# EAGLE board PIC32 (EAGLE 5.12)
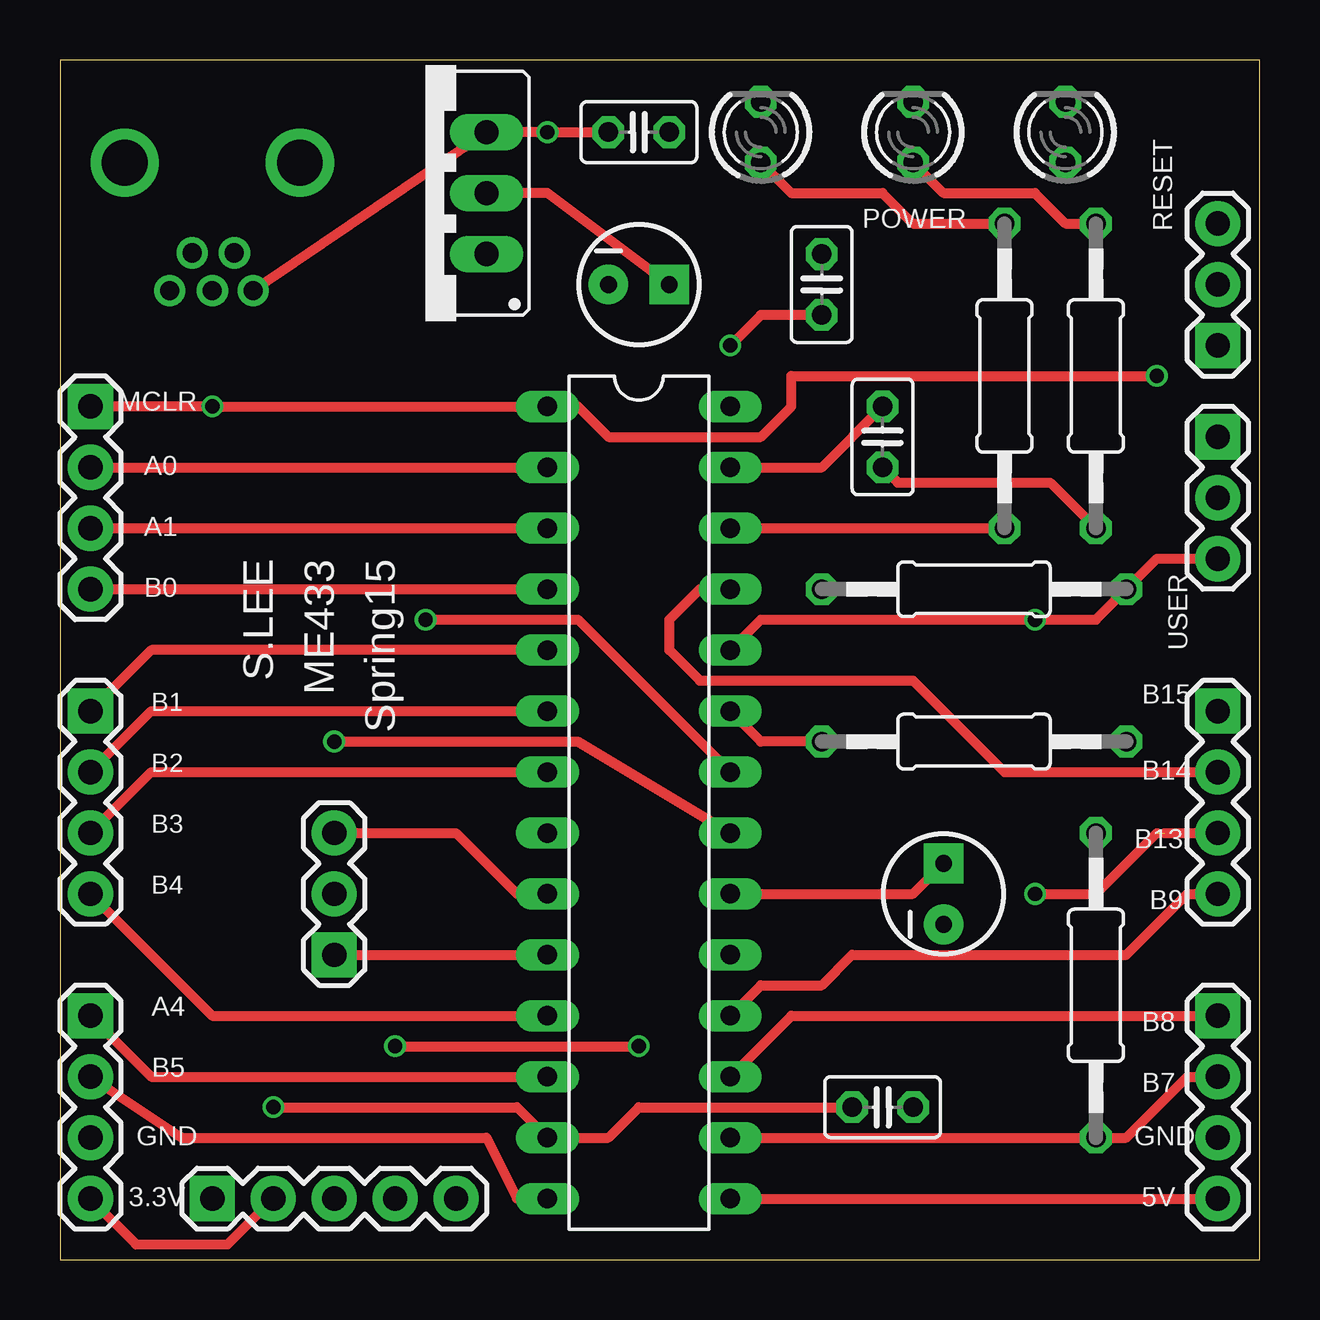
[diagram p0: board, top side]
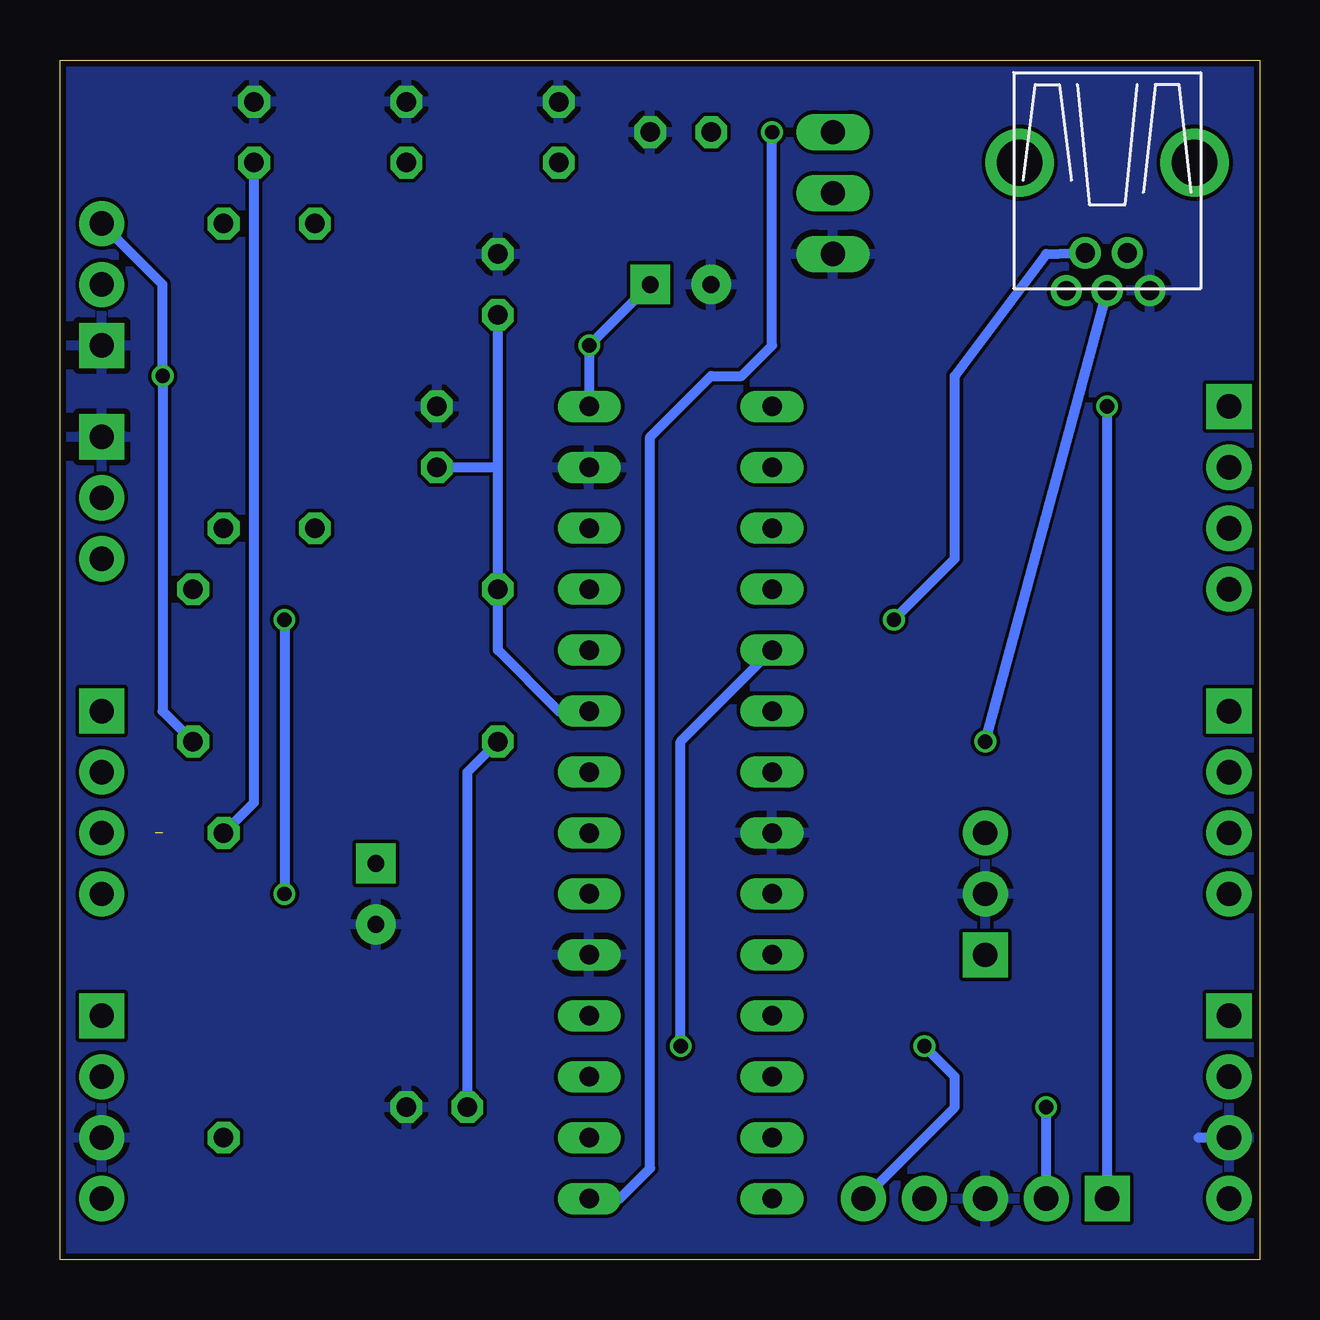
[diagram p1: board, bottom side, seen from below]

Size 50 x 50 mm. Coordinates in mm from the lower left corner, seen from the top.
Outline: 0,0 50,0 50,50 0,50 0,0
Copper layers (1*16): Top 0.035mm / dielectric 1.5mm / Bottom 0.035mm
Design rules "SeeedStudio_2layer_DRU_no_angle_20140221": minimum track width 6mil, minimum drill 12mil, track to track 6mil, track to pad 6mil, pad to pad 6mil, via to via 6mil, smd to smd 0mil, copper to edge 10mil, drill to drill 10mil, minimum pad ring 10mil, minimum via ring 6mil, stop-mask expansion 2mil, vias tented up to drill 100mil, thermal gap 10mil

## Footprints (pad centres in the part's own frame; a part is rotated, then mirrored left to right if it is on the bottom)
C025-025X050 = drill 0.813 octagon: 1 -1.27,0; 2 1.27,0
LED3MM = drill 0.813 octagon: A -1.27,0; K 1.27,0
0207/12 = drill 0.813 octagon: 1 -6.35,0; 2 6.35,0
DIL28-3 = drill 0.813 long: 1 -16.51,-3.81; 2 -13.97,-3.81; 3 -11.43,-3.81; 4 -8.89,-3.81; 5 -6.35,-3.81; 6 -3.81,-3.81; 7 -1.27,-3.81; 8 1.27,-3.81; 9 3.81,-3.81; 10 6.35,-3.81; 11 8.89,-3.81; 12 11.43,-3.81; 13 13.97,-3.81; 14 16.51,-3.81; 15 16.51,3.81; 16 13.97,3.81; 17 11.43,3.81; 18 8.89,3.81; 19 6.35,3.81; 20 3.81,3.81; 21 1.27,3.81; 22 -1.27,3.81; 23 -3.81,3.81; 24 -6.35,3.81; 25 -8.89,3.81; 26 -11.43,3.81; 27 -13.97,3.81; 28 -16.51,3.81
1X03 = drill 1.016 pad 1.88 square: 1 0,0 | drill 1.016 pad 1.88 round: 2 2.54,0; 3 5.08,0
CAP_POL_D = drill 0.7 pad 1.651 square: 1 1.27,0 | drill 0.7 pad 1.651 round: 2 -1.27,0
USB-MINIB = drill 0.8 round: D+ 4.064,0; D- 2.489,0.914; GND 4.064,-1.778; ID 2.489,-0.838; VBUS 4.064,1.702 | drill 1.9 round: P$6 -1.27,-3.65; P$7 -1.27,3.65
TO220 = drill 1.016 long: 1 -2.54,0; 2 0,0; 3 2.54,0
1X04 = drill 1.016 pad 1.88 square: 1 0,0 | drill 1.016 pad 1.88 round: 2 2.54,0; 3 5.08,0; 4 7.62,0
1X05 = drill 1.016 pad 1.88 square: 1 0,0 | drill 1.016 pad 1.88 round: 2 2.54,0; 3 5.08,0; 4 7.62,0; 5 10.16,0

## Placement (x,y rotation side)
C2  0.1uF  [C025-025X050]  31.75,40.64 270 top
C4  0.1uF  [C025-025X050]  34.29,34.29 270 top
C5  0.1uF  [C025-025X050]  24.13,46.99 180 top
C6  0.1uF  [C025-025X050]  34.29,6.35 0 top
LED1  [LED3MM]  29.21,46.99 90 top
LED2  [LED3MM]  35.56,46.99 90 top
LED3  [LED3MM]  41.91,46.99 90 top
R1  10k  [0207/12]  38.1,21.59 180 top
R2  330  [0207/12]  43.18,36.83 270 top
R3  330  [0207/12]  39.37,36.83 270 top
R4  330  [0207/12]  43.18,11.43 270 top
R5  10k  [0207/12]  38.1,27.94 180 top
U$1  PIC32  [DIL28-3]  24.13,19.05 270 top
U$4  1X03_HEADER  [1X03]  48.26,38.1 90 top
U$5  10uF  [CAP_POL_D]  36.83,15.24 90 top
U$6  1X03_HEADER  [1X03]  48.26,34.29 270 top
U$7  USB  [USB-MINIB]  6.35,44.45 270 top
U$9  LD1117  [TO220]  17.78,44.45 90 top
U$11  10uF  [CAP_POL_D]  24.13,40.64 0 top
U$12  1X04_HEADER  [1X04]  1.27,35.56 270 top
U$13  1X04_HEADER  [1X04]  1.27,22.86 270 top
U$14  1X04_HEADER  [1X04]  48.26,22.86 270 top
U$15  1X04_HEADER  [1X04]  1.27,10.16 270 top
U$16  1X04_HEADER  [1X04]  48.26,10.16 270 top
U$17  PICkit3  [1X05]  6.35,2.54 0 top
U$18  1X03_HEADER  [1X03]  11.43,12.7 90 top

## Library data of the parts
C2 C4-C6 = resistor
LED1-LED3 R1-R5 U$1 U$4-U$7 U$9 U$11-U$18 = ME433

## Nets
A0: U$1.2 U$12.2
A1: U$1.3 U$12.3
A4: U$1.12 U$15.1
B0: U$1.4 U$12.4
B2: U$1.6 U$13.2
B4: U$1.11 U$13.4
B5: U$1.14 U$15.2
B7: R4.2 U$1.16 U$16.2
B14: U$1.25 U$14.2
B15: R3.2 U$1.26
D+: U$1.21 U$7.D+
D-: U$1.22 U$7.D-
GND: C2.1 C4.1 C5.1 C6.2 LED1.K LED2.K LED3.K U$1.8 U$1.19 U$1.27 U$4.1 U$5.2 U$6.1 U$7.GND U$9.1 U$11.2 U$15.3 U$16.3 U$17.3 U$18.2
MCLR: R1.1 U$1.1 U$4.3 U$12.1 U$17.1
N$1: LED3.A R4.1
N$2: LED2.A R2.1
N$4: U$1.10 U$18.1
N$5: U$1.9 U$18.3
N$6: C2.2 C4.2 C6.1 R1.2 R2.2 R5.2 U$1.13 U$1.23 U$1.28 U$9.2 U$11.1 U$15.4 U$17.2
N$7: C5.2 U$1.15 U$7.VBUS U$9.3 U$16.4
N$8: R5.1 U$1.24 U$6.3 U$14.3
N$9: U$1.5 U$13.1 U$17.5
N$18: U$1.20 U$5.1
N$31: LED1.A R3.1
R0: U$17.4
R3: U$1.7 U$13.3
R8: U$1.17 U$16.1
R9: U$1.18 U$14.4
R15: U$14.1

## Tracks (layer width: path | path; a pad name or v marks a point on that pad's centre or on a via)
A0
  Top 0.406: U$12.2 U$1.2
A1
  Top 0.406: U$12.3 U$1.3
A4
  Top 0.406: U$1.12 3.81,7.62 U$15.1
B0
  Top 0.406: U$12.4 U$1.4
B2
  Top 0.406: U$13.2 3.81,22.86 U$1.6
B4
  Top 0.406: U$13.4 6.35,10.16 U$1.11
B5
  Top 0.406: U$1.14 19.05,2.54 17.78,5.08 5.08,5.08 U$15.2
B7
  Top 0.406: U$1.16 R4.2 44.45,5.08 46.99,7.62 U$16.2
B14
  Top 0.406: U$1.25 26.67,27.94 25.4,26.67 25.4,25.4 26.67,24.13 35.56,24.13 39.37,20.32 U$14.2
B15
  Top 0.406: U$1.26 R3.2
D+  (via drill 0.6)
  Top 0.406: U$1.21 21.59,21.59 v11.43,21.59
  Bottom 0.406: v11.43,21.59 U$7.D+
D-  (via drill 0.6)
  Top 0.406: U$1.22 21.59,26.67 v15.24,26.67
  Bottom 0.406: v15.24,26.67 12.7,29.21 12.7,36.83 8.89,41.91 U$7.D-
GND
  Top 0.406: U$1.27 31.75,33.02 C4.1
  Bottom 0.406: U$15.3 2.54,5.08
  pour Bottom: -6.35,53.34 -6.35,-2.54 53.34,-2.54 53.34,55.88 -6.35,55.88
MCLR  (via drill 0.6)
  Top 0.406: U$12.1 v6.35,35.56 U$1.1 21.59,35.56 22.86,34.29 29.21,34.29 30.48,35.56 30.48,36.83 v45.72,36.83
  Bottom 0.406: U$17.1 v6.35,35.56 | R1.1 45.72,22.86 v45.72,36.83 45.72,40.64 U$4.3
N$1
  Bottom 0.406: R4.1 41.91,19.05 LED3.A
N$2
  Top 0.406: R2.1 41.91,43.18 40.64,44.45 36.83,44.45 LED2.A
N$4
  Top 0.406: U$18.1 U$1.10
N$5
  Top 0.406: U$1.9 19.05,15.24 16.51,17.78 U$18.3
N$6  (via drill 0.6)
  Top 0.406: C6.1 24.13,6.35 22.86,5.08 U$1.13 19.05,6.35 v8.89,6.35 | U$15.4 3.17,0.64 6.99,0.64 U$17.2 | R1.2 29.21,21.59 U$1.23 | C2.2 29.21,39.37 v27.94,38.1 | R2.2 41.27,32.38 34.92,32.38 C4.2 | U$11.1 20.32,44.45 U$9.2
  Bottom 0.406: U$17.2 v8.89,6.35 | R1.2 33.02,20.32 C6.1 | U$1.28 v27.94,38.1 U$11.1 | 31.75,33.02 C4.2 | 31.75,33.02 C2.2 | 31.75,33.02 R5.2 31.75,25.4 29.21,22.86 U$1.23
N$7  (via drill 0.6)
  Top 0.406: U$1.15 U$16.4 | C5.2 v20.32,46.99 U$9.3 U$7.VBUS
  Bottom 0.406: U$1.15 26.67,2.54 25.4,3.81 25.4,34.29 22.86,36.83 21.59,36.83 20.32,38.1 v20.32,46.99
N$8  (via drill 0.6)  (1 unrouted)
  Top 0.406: 45.72,17.78 43.18,15.24 v40.64,15.24 | 46.04,17.78 U$14.3 | U$6.3 45.72,29.21 R5.1 43.18,26.67 v40.64,26.67 29.21,26.67 U$1.24
  Bottom 0.406: v40.64,26.67 v40.64,15.24
N$9  (via drill 0.6)
  Top 0.406: v13.97,8.89 v24.13,8.89 | U$13.1 3.81,25.4 U$1.5
  Bottom 0.406: U$17.5 12.7,6.35 12.7,7.62 v13.97,8.89 | v24.13,8.89 24.13,21.59 U$1.5
N$18
  Top 0.406: U$1.20 35.56,15.24 U$5.1
N$31
  Top 0.406: R3.1 35.56,43.18 34.29,44.45 30.48,44.45 LED1.A
R3
  Top 0.406: U$13.3 3.81,20.32 U$1.7
R8
  Top 0.406: U$16.1 30.48,10.16 U$1.17
R9
  Top 0.406: U$14.4 46.99,15.24 44.45,12.7 33.02,12.7 31.75,11.43 29.21,11.43 U$1.18

## Text on the board
tPlace: POWER | RESET | MCLR | A0 | A1 | S.LEE | ME433 | Spring15 | B0 | USER | B1 | B15 | B2 | B14 | B3 | B13 | B4 | B9 | A4 | B8 | B5 | B7 | GND | GND | 3.3V | 5V